# Altium PCB eDP_adapter_dvt1.PcbDoc (part 2 of 2)
Units mil, origin at the board's own origin, x right, y up, seen from the top; angles counter-clockwise.
Board outline 1964.57 x 1377.95 mil, 4 copper layers (Top Layer, Internal Plane 1, Internal Plane 2, Bottom Layer), stack 65.8 mil thick; 112 components, 78 nets, 1150 pads, 214 vias.
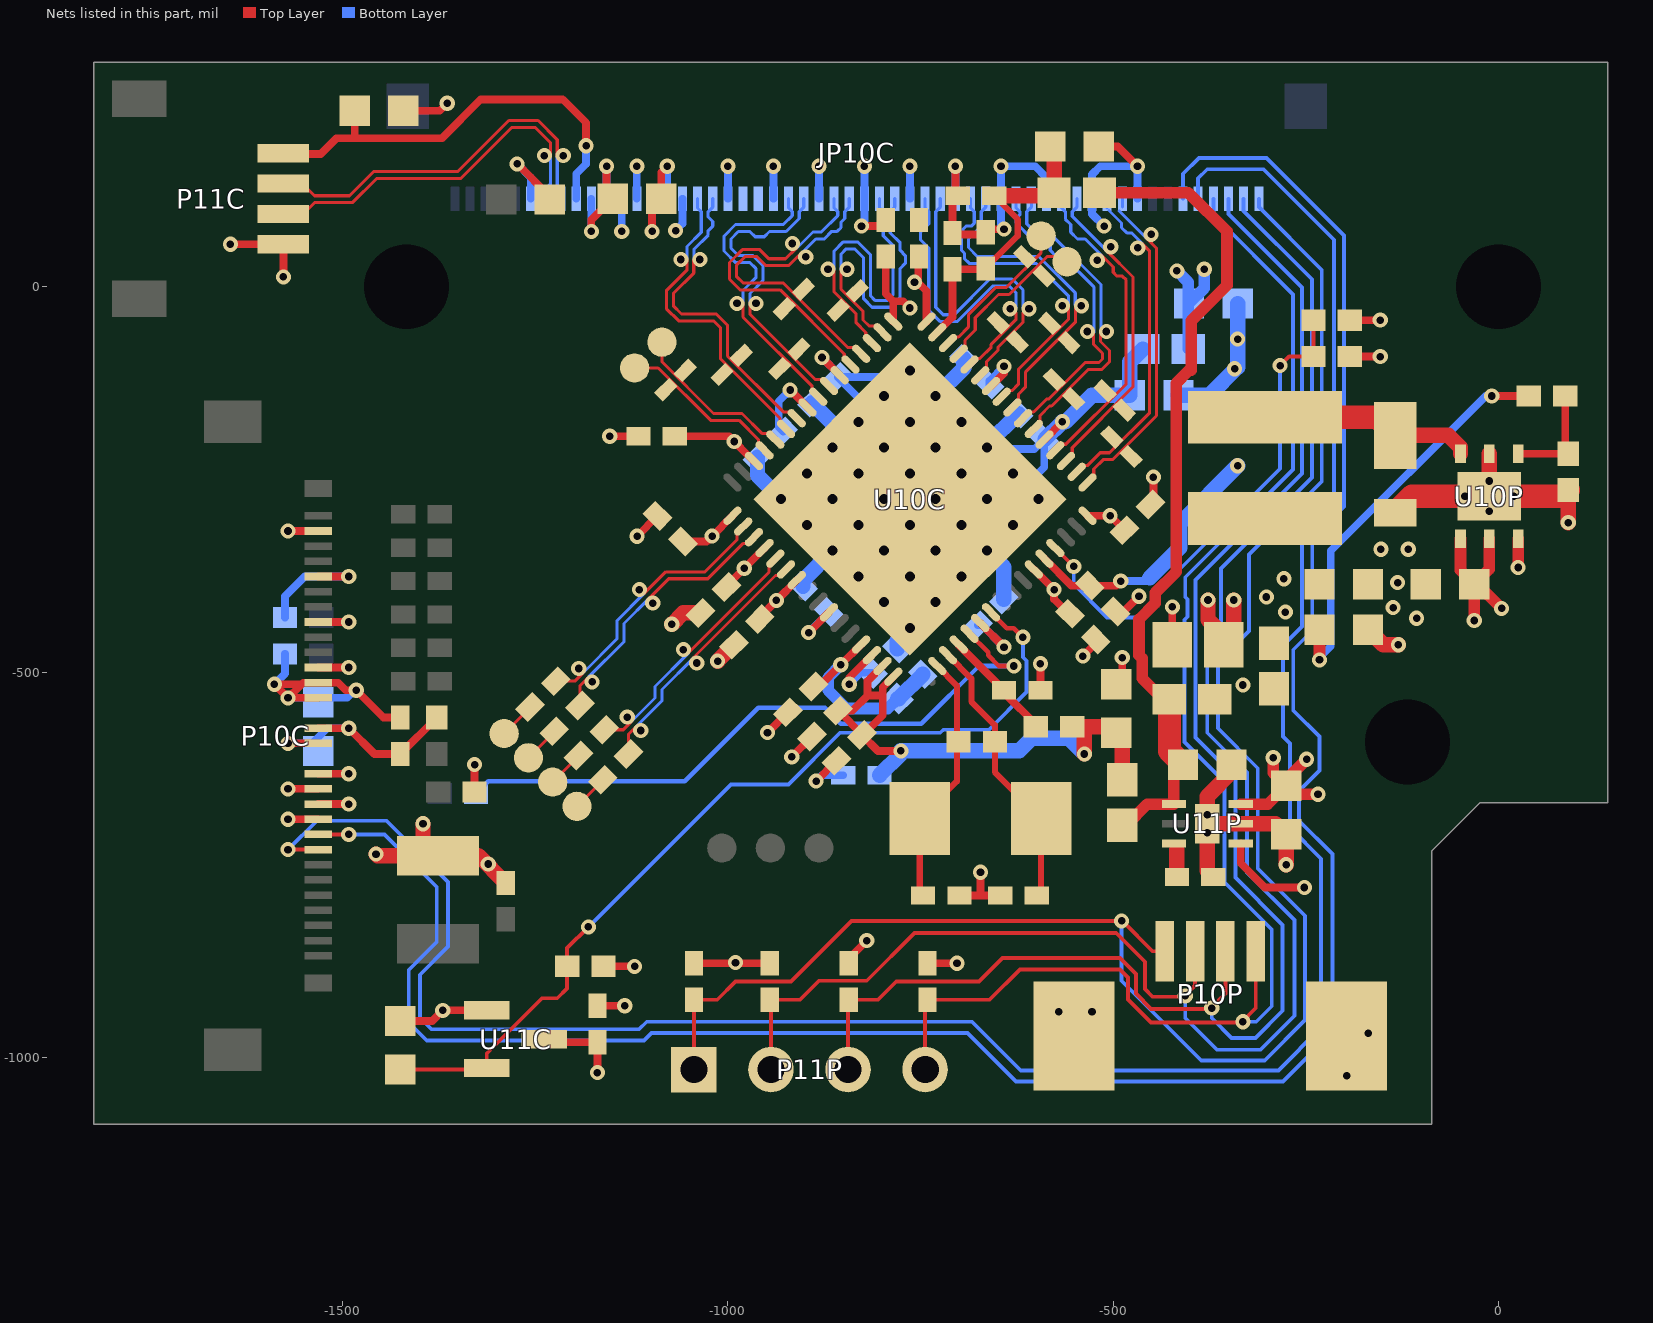
[diagram p4: the nets of this part, all layers, seen from the top]

## Via types
v1: diameter 19.68, hole 9.84, Top Layer to Bottom Layer, tented top, 176 vias
v2: diameter 25.98, hole 12.99, Top Layer to Bottom Layer, tented top, 36 vias
v3: diameter 20, hole 10, Top Layer to Bottom Layer, tented bottom, 2 vias

## Nets (pads, with @x,y where several pads share a name; then routed paths per layer and width w, separated by ;. In a path a pad name is that pad's centre, name@x,y a point inside that pad or via, vN(x,y) a via of type N, cw(c..) or ccw(c..) an arc to the next point about the centre after c; other vN are vias at no path point) (continued)
GND: C10P.1 C11P.1 C12P.2 C13P.2 C14P.1 C15P.1 C16C.2 C16P.1 C17C.1 C17P.1 C18C.1 C18P.1 C19C.1 C19P.1 C20P.1 C21P.1 C22P.1 C23C.2 C23P.1 C24P.1 C25C.2 C25P.1 C26C.2 C26P.1 C27C.2 C27P.1 C28C.2 C29C.2 C30C.2 C31C.2 C32C.2 C33C.2 C34C.2 C35C.2 C36C.2 C37C.2 C38C.2 C39C.2 C40C.2 C41C.2 C42C.2 C43C.2 C44C.2 C45C.2 C46C.2 C47C.2 C48C.2 C49C.1 C50C.1 C51C.2 D10P.1 JP10C.6 JP10C.10 JP10C.11 JP10C.16 JP10C.19 JP10C.22 JP10C.25 JP10C.28 JP10C.31 JP10C.34 JP10C.37 JP10C.40 JP10C.43 JP10C.46 P10C.2 P10C.5 P10C.8 P10C.11 P10C.15 P10C.16 P10C.18 P10C.19 P10C.20 P10C.21 P10P.MP1 P10P.MP2 P11C.1 R10P.2 R17C.2 R25C.2 R31C.2 U10C.65 U10P.2 U10P.7 U11C.1 U11P.2 U11P.PAD | length 4668.8
  Top Layer w10: v1(-1645.67,55.12) P11C.1@-1576.77,55.12 v1(-1576.77,12.8) ; v1(-1570.87,-690.94) P10C.21@-1531.5,-690.94 ; v1(-1570.87,-651.57) P10C.19@-1531.5,-651.57 ; v1(-1570.87,-592.52) P10C.16@-1531.5,-592.52 ; v1(-1570.87,-316.93) P10C.2@-1531.5,-316.93 ; P10C.20@-1531.5,-671.26 v1(-1492.13,-671.26) ; P10C.18@-1531.5,-631.89 v1(-1492.13,-631.89) ; P10C.15@-1531.5,-572.83 v1(-1492.13,-572.83) -1458.66,-606.3 C16C.2@-1425.2,-606.3 R25C.2@-1377.95,-559.06 ; P10C.11@-1531.5,-494.09 v1(-1492.13,-494.09) ; P10C.8@-1531.5,-435.04 v1(-1492.13,-435.04) ; P10C.5@-1531.5,-375.98 v1(-1492.13,-375.98) ; C51C.2@-1425.2,-952.76 -1383.86,-952.76 v1(-1370.08,-938.98) U11C.1@-1312.99,-938.98 ; C49C.1@-1421.26,228.35 -1374.02,228.35 v1(-1364.17,238.19) ; v1(-1273.62,159.45) -1231.3,117.13 C35C.2@-1231.3,113.19 ; v1(-1177.17,71.85) -1177.17,86.61 C50C.1@-1149.61,114.17 -1157.48,122.05 v1(-1157.48,156.5) ; C36C.2@-1169.29,-933.07 v1(-1133.86,-933.07) ; v1(-1153.45,-193.9) C29C.2@-1116.14,-193.9 ; v1(-1117.88,-323.65) C39C.2@-1091.51,-297.27 ; C24P.1@-1044.09,-877.95 C25P.1@-945.67,-877.95 ; v1(-948.59,-578.51) C40C.2@-922.22,-552.14 ; v1(-917.1,-610.01) C46C.2@-890.72,-583.63 ; v1(-885.6,-641.51) C45C.2@-859.22,-615.13 ; C26P.1@-843.31,-877.95 -843.31,-871.85 v1(-819.88,-848.43) ; v1(-826.67,78.74) C30C.2@-789.37,78.74 ; C27P.1@-740.94,-877.95 v1(-702.76,-877.95) ; C48C.2@-708.66,67.91 -666.34,67.91 -659.45,74.8 v1(-641.73,74.8) ; C48C.2@-708.66,69.88 -708.66,111.22 C18P.1@-701.77,118.11 -704.72,121.06 v1(-704.72,156.5) ; C18C.1@-699.52,-790.07 -672.24,-790.07 ; v1(-672.24,-759.84) -672.24,-790.07 ; C19C.1@-646.54,-790.07 -672.24,-790.07 ; C44C.2@-594.49,-523.62 v1(-594.49,-489.17) ; v1(-539.37,-479.33) -522.67,-462.63 C27C.2@-522.67,-457.65 ; C19P.1@-518.7,182.09 -494.09,182.09 v1(-468.5,156.5) ; C25C.2@-491.17,-426.15 v1(-466.59,-401.57) ; C15P.1@-488.19,-515.75 v1(-488.19,-481.3) ; C31C.2@-451.8,-282.51 -447.83,-278.54 v1(-447.83,-247.05) ; C12P.2@-423.23,-464.57 v1(-423.23,-415.35) ; R17C.2@-192.91,-43.31 v1(-153.54,-43.31)
  Top Layer w20: v1(-1456.69,-736.22) -1454.72,-738.19 C23C.2@-1375.98,-738.19 ; v1(-1395.67,-696.85) -1395.67,-718.5 C23C.2@-1375.98,-738.19 ; C34C.2@-1288.39,-773.62 -1323.82,-738.19 C23C.2@-1375.98,-738.19 ; v1(-1072.83,-437.99) -1058.04,-423.2 C41C.2@-1035.4,-423.2 ; v1(-1013.36,-485.8) C43C.2@-992.1,-464.54 ; C16P.1@-370.08,-765.75 -377.95,-757.87 v3(-377.95,-708.66) U11P.PAD@-377.95,-696.85 ; C17P.1@-346.46,-620.08 -346.46,-629.92 -377.95,-661.42 v3(-377.95,-685.04) U11P.PAD@-377.95,-696.85 ; v1(-275.59,-750) C20P.1@-275.59,-710.63 -289.37,-696.85 U11P.2@-334.65,-696.85 U11P.PAD@-377.95,-696.85 ; C11P.1@-169.29,-444.88 -149.61,-464.57 v1(-129.92,-464.57) ; U10P.7@-11.97,-271.78 v1(-11.97,-252.09) U10P.2@-11.97,-216.66 ; v1(90.55,-306.1) R10P.2@90.55,-263.78
  Top Layer w30: D10P.1@-133.86,-293.31 -112.33,-271.78 v1(-43.46,-271.78) U10P.7@-11.97,-271.78 v1(19.53,-271.78) 82.55,-271.78 R10P.2@90.55,-263.78
  Bottom Layer w10: R31C.2@-1574.8,-429.13 -1574.8,-401.57 -1549.21,-375.98 v1(-1492.13,-375.98) ; v1(-1570.87,-592.52) -1539.37,-592.52 -1519.69,-572.83 v1(-1492.13,-572.83) ; v1(-1273.62,159.45) -1255.91,141.73 JP10C.6@-1255.91,114.17 ; v1(-1177.17,71.85) JP10C.10@-1177.17,114.17 ; JP10C.11@-1157.48,114.17 v1(-1157.48,156.5) ; v1(-1067.91,72.83) -1059.06,81.69 JP10C.16@-1059.06,114.17 ; JP10C.19@-1000,114.17 v1(-1000,156.5) ; JP10C.22@-940.94,114.17 v1(-940.94,156.5) ; v1(-885.6,-641.51) -877.95,-633.86 C14P.1@-850.39,-633.86 ; JP10C.25@-881.89,114.17 v1(-881.89,156.5) ; v1(-826.67,78.74) -822.83,82.58 JP10C.28@-822.83,114.17 v1(-822.83,156.5) ; JP10C.31@-763.78,114.17 v1(-763.78,156.5) ; JP10C.34@-704.72,114.17 v1(-704.72,156.5) ; v1(-641.73,74.8) -645.67,78.74 JP10C.37@-645.67,114.17 v1(-645.67,156.5) -601.38,156.5 -586.61,141.73 JP10C.40@-586.61,114.17 ; v1(-511.81,78.74) -527.56,94.49 JP10C.43@-527.56,114.17 -527.56,145.67 -516.73,156.5 v1(-468.5,156.5) JP10C.46@-468.5,114.17
  Bottom Layer w20: C33C.2@-961.59,-221.43 -961.59,-244.82 v2(-930.81,-275.59) ; C42C.2@-902.53,-388.81 -902.53,-380.93 v2(-864,-342.4) ; C37C.2@-890.72,-150.56 -864,-177.28 v2(-864,-208.78) ; C22P.1@-780.48,-469.52 -780.48,-459.33 v2(-763.78,-442.62) ; v2(-730.37,-141.96) -693.87,-105.46 C32C.2@-693.87,-93.53 ; v2(-663.56,-342.4) -641.98,-363.98 C26C.2@-641.98,-405.74 ; v2(-663.56,-208.78) -663.56,-204.96 C38C.2@-623,-164.4 ; C23P.1@-415.35,-140.75 -375,-140.75 -338.58,-104.33 C21P.1@-338.58,-21.65
  other v1: -196.85,-1023.62 -169.29,-968.5 -570.87,-940.94 -527.56,-940.94 -990.16,-876.97 -1311.02,-749.02 -106.3,-430.12 -136.81,-416.34 -130.91,-383.86 -152.56,-340.55 -117.13,-340.55 -11.97,-291.46 -342.52,-106.3 -338.58,-67.91
  other v2: -797.19,-409.22 -730.37,-409.22 -830.59,-375.81 -763.78,-375.81 -696.97,-375.81 -797.19,-342.4 -730.37,-342.4 -897.41,-309 -830.59,-309 -763.78,-309 -696.97,-309 -630.15,-309 -864,-275.59 -797.19,-275.59 -730.37,-275.59 -663.56,-275.59 -596.75,-275.59 -897.41,-242.18 -830.59,-242.18 -763.78,-242.18 -696.97,-242.18 -630.15,-242.18 -797.19,-208.78 -730.37,-208.78 -830.59,-175.37 -763.78,-175.37 -696.97,-175.37 -797.19,-141.96 -763.78,-108.56
GPIO_PWM1: JP10C.50 P10C.23 | length 3031.4
  Top Layer w5: v1(-1570.87,-730.32) P10C.23@-1531.5,-730.32
  Bottom Layer w5: v1(-1570.87,-730.32) -1533.46,-692.91 -1442.91,-692.91 -1363.19,-772.64 -1363.19,-856.3 -1399.61,-892.72 -1399.61,-948.82 -1384.84,-963.58 -1115.16,-963.58 -1105.32,-953.74 -683.07,-953.74 -619.93,-1016.88 -285.58,-1016.88 -230.17,-961.47 -230.17,-742.27 -270.67,-701.77 -270.67,-592.52 -279.53,-583.66 -279.53,-465.55 -254.92,-440.94 -254.92,-320.87 -213.58,-279.53 -213.58,61.02 -305.12,152.56 -377.95,152.56 -389.76,140.75 JP10C.50@-389.76,114.17
I2C_ADR: R16C.2 R17C.1 U10C.13 | length 660.9
  Top Layer w5: U10C.13@-575.17,-338.92 v1(-551.18,-362.91) ; v1(-283.46,-102.36) -271.65,-90.55 R16C.2@-240.16,-90.55 R17C.1@-240.16,-43.31
  Bottom Layer w5: v1(-551.18,-362.91) -551.18,-385.83 -507.87,-429.13 -460.63,-429.13 -444.88,-413.39 -444.88,-397.64 -283.46,-236.22 v1(-283.46,-102.36)
LCD_BL_ON: JP10C.49 P10C.22 | length 3034.5
  Top Layer w5: P10C.22@-1531.5,-710.63 v1(-1492.13,-710.63)
  Bottom Layer w5: v1(-1492.13,-710.63) -1445.87,-710.63 -1377.8,-778.69 -1377.8,-850.25 -1414.22,-886.66 -1414.22,-954.87 -1390.9,-978.2 -1109.1,-978.2 -1099.26,-968.36 -689.12,-968.36 -625.98,-1031.5 -279.53,-1031.5 -215.55,-967.52 -215.55,-736.22 -258.86,-692.91 -258.86,-654.53 -232.28,-627.95 -232.28,-583.66 -266.3,-549.64 -266.3,-471.03 -241.7,-446.42 -241.7,-326.34 -200.36,-285 -200.36,66.5 -301.18,167.32 -388.78,167.32 -409.45,146.65 JP10C.49@-409.45,114.17
LCD_XM: C26P.2 JP10C.52 P10P.3 P11P.3 | length 2035.7
  Top Layer w5: P11P.3@-844.09,-1015.75 -844.09,-925.98 C26P.2@-843.31,-925.2 -805.12,-925.2 -781.5,-901.57 -674.21,-901.57 -643.7,-871.06 -491.14,-871.06 -470.47,-891.73 -470.47,-917.32 -450.79,-937.01 -374.02,-937.01 -354.33,-917.32 P10P.3@-354.33,-862.2
  Bottom Layer w5: v1(-372.05,-936.02) -372.05,-949.21 -346.46,-974.8 -315.35,-974.8 -280.12,-939.57 -280.12,-828.21 -341.54,-766.8 -341.54,-636.81 -393.31,-585.04 -393.31,-380.52 -254.92,-242.13 -254.92,-0.98 -350.39,94.49 JP10C.52@-350.39,114.17
LCD_XP: C24P.2 JP10C.54 P10P.1 P11P.1 | length 2343.1
  Top Layer w5: P11P.1@-1044.09,-1015.75 C24P.2@-1044.09,-925.2 -1013.78,-925.2 -990.16,-901.57 -918.31,-901.57 -839.57,-822.83 -488.19,-822.83 -448.82,-862.2 P10P.1@-433.07,-862.2
  Bottom Layer w5: v1(-489.17,-822.83) -489.17,-900.59 -385.83,-1003.94 -303.28,-1003.94 -250.98,-951.64 -250.98,-816.14 -312.4,-754.73 -312.4,-624.74 -364.17,-572.97 -364.17,-487.2 -323.82,-446.85 -323.82,-347.21 -229.33,-252.73 -229.33,21.65 -311.02,103.35 JP10C.54@-311.02,114.17
LCD_YM: C27P.2 JP10C.51 P10P.4 P11P.4 | length 1905
  Top Layer w5: P11P.4@-744.09,-1015.75 -744.09,-928.35 C27P.2@-740.94,-925.2 -660.43,-925.2 -621.06,-885.83 -491.14,-885.83 -480.81,-896.16 -480.81,-924.7 -450.79,-954.72 -333.66,-954.72 -314.96,-936.02 P10P.4@-314.96,-862.2
  Bottom Layer w5: JP10C.51@-370.08,114.17 -370.08,93.5 -266.73,-9.84 -266.73,-237.23 -406.5,-377 -406.5,-402.56 -403.54,-405.51 -403.54,-428.15 -407.48,-432.09 -407.48,-590.9 -355.7,-642.68 -355.7,-772.67 -294.29,-834.08 -294.29,-933.7 -314.33,-953.74 v1(-331.69,-953.74)
LCD_YP: C25P.2 JP10C.53 P10P.2 P11P.2 | length 2190.1
  Top Layer w5: P11P.2@-944.09,-1015.75 -944.09,-926.77 C25P.2@-945.67,-925.2 -906.5,-925.2 -881.89,-900.59 -819.88,-900.59 -757.87,-838.58 -496.06,-838.58 -458.66,-875.98 -458.66,-911.42 -448.82,-921.26 -408.46,-921.26 -393.7,-906.5 P10P.2@-393.7,-862.2
  Bottom Layer w5: v1(-406.5,-920.28) -406.5,-948.82 -365.16,-990.16 -308.99,-990.16 -264.76,-945.93 -264.76,-821.85 -326.18,-760.44 -326.18,-630.45 -377.95,-578.67 -377.95,-479.33 -360.24,-461.61 -360.24,-365.54 -242.13,-247.43 -242.13,9.84 -330.71,98.43 JP10C.53@-330.71,114.17
LVDS0_CLK_N: JP10C.36 R11C.2 U10C.24 | length 418.1
  Top Layer w4.02: U10C.24@-630.85,-156.58 -622.7,-148.43 -622.7,-139.11 -614.02,-130.42 -614.02,-111.02 -549.06,-46.06 v1@-549.06,-23.62
  Bottom Layer w4.02: JP10C.36@-665.35,114.17 -665.35,103.35 -671.26,97.44 -671.26,78.79 -687.83,62.21 -687.83,50.98 -676.23,39.37 -596.5,39.37 -549.21,-7.92 v1@-549.21,-23.62
  other v1: -541.34,-24.61
LVDS0_CLK_P: JP10C.35 R11C.1 U10C.25 | length 417.2
  Top Layer w4.02: U10C.25@-644.77,-142.66 -636.81,-134.7 -631.05,-134.7 -623.03,-126.69 -623.03,-107.28 -558.07,-42.32 v1@-558.07,-23.62
  Bottom Layer w4.02: JP10C.35@-685.04,114.17 -685.04,102.2 -680.28,97.44 -680.28,82.52 -684.06,78.74 -690.95,78.74 -694.88,74.8 -694.88,67.91 -696.85,65.94 -696.85,47.24 -692.91,43.31 -692.91,36.42 -686.85,30.35 -600.24,30.35 -558.23,-11.65 v1@-558.23,-23.62
  other v1: -565.94,-24.61
LVDS0_TX_0_N: JP10C.45 R14C.2 U10C.17 | length 426.9
  Top Layer w4.02: U10C.17@-533.41,-254.02 -525.27,-245.87 -525.27,-236.55 -513.13,-224.41 -500.98,-224.41 -474.41,-197.83 -443.74,-167.16 -443.74,49.99 v1@-455.24,61.49
  Bottom Layer w4.02: -492.13,98.43 v1@-455.71,62.01 ; JP10C.45@-488.19,103.35 JP10C.45@-488.19,114.17
  other v1: -450.79,67.91
LVDS0_TX_0_P: JP10C.44 R14C.1 U10C.18 | length 425.3
  Top Layer w4.02: U10C.18@-547.33,-240.1 -539.38,-232.14 -533.61,-232.14 -516.86,-215.39 -504.72,-215.39 -452.76,-163.43 -452.76,46.26 v1@-461.61,55.12
  Bottom Layer w4.02: JP10C.44@-507.87,102.2 JP10C.44@-507.87,114.17 ; JP10C.44@-505.39,98.94 -489.17,82.72 -489.17,76.77 -482.31,69.9 -476.36,69.9 v1@-462.08,55.63
  other v1: -468.19,50.51
LVDS0_TX_1_N: JP10C.42 R13C.2 U10C.19 | length 410.1
  Top Layer w4.02: U10C.19@-561.25,-226.18 -553.1,-218.03 -553.1,-208.71 -474.25,-129.85 -474.25,12.64 v1@-507.87,46.26
  Bottom Layer w4.02: JP10C.42@-547.24,114.17 -547.24,103.35 -553.15,97.44 -553.15,91.54 v1@-508.86,47.24
  other v1: -503.27,51.85
LVDS0_TX_1_P: JP10C.41 R13C.1 U10C.20 | length 411
  Top Layer w4.02: U10C.20@-575.17,-212.26 -567.21,-204.3 -561.45,-204.3 -483.27,-126.12 -483.27,8.9 -488.19,13.82 -495.12,13.82 -499.98,18.68 -499.98,25.61 v1@-514.25,39.88
  Bottom Layer w4.02: JP10C.41@-566.93,114.17 -566.93,102.2 -562.17,97.44 -562.17,87.8 -555.12,80.75 -555.12,70.87 -546.26,62.01 -536.37,62.01 v1@-515.23,40.87
  other v1: -520.67,34.45
LVDS0_TX_2_N: JP10C.39 R12C.2 U10C.22 | length 410.8
  Top Layer w4.02: U10C.22@-603.01,-184.42 -594.86,-176.27 -594.86,-166.95 -582.6,-154.69 -579.93,-154.69 -540.94,-115.7 -532.53,-107.28 -514.76,-107.28 -504.92,-97.44 -504.92,-82.68 -516.57,-71.02 v1@-516.57,-57.09
  Bottom Layer w4.02: JP10C.39@-606.3,114.17 -606.3,103.35 -612.2,97.44 -612.2,81.65 -603.39,72.83 -585.67,72.83 -515.75,2.91 v1@-515.75,-59.06
  other v1: -508.86,-58.07
LVDS0_TX_2_P: JP10C.38 R12C.1 U10C.23 | length 410.9
  Top Layer w4.02: U10C.23@-616.93,-170.5 -608.97,-162.54 -603.21,-162.54 -586.33,-145.67 -583.66,-145.67 -547.31,-109.32 -536.26,-98.27 -518.5,-98.27 -513.94,-93.71 -513.94,-86.41 -525.59,-74.76 v1@-525.59,-57.09
  Bottom Layer w4.02: JP10C.38@-625.98,114.17 -625.98,102.2 -621.22,97.44 -621.22,93.35 -625.98,88.58 -625.98,82.68 -607.13,63.82 -589.41,63.82 -581.69,56.1 -581.69,47.24 -574.8,40.35 -565.94,40.35 -524.76,-0.83 v1@-524.76,-59.06
  other v1: -533.46,-58.07
LVDS0_TX_3_N: JP10C.33 R10C.2 U10C.27 | length 413.3
  Top Layer w4.02: U10C.27@-672.61,-114.82 -664.46,-106.67 -664.46,-97.35 -649.45,-82.34 -649.45,-78.54 -616.97,-46.06 v1@-616.97,-33.46
  Bottom Layer w4.02: JP10C.33@-724.41,114.17 -724.41,103.35 -730.31,97.44 -730.31,32.68 -730.31,-26.57 -720.63,-36.26 -706.49,-36.26 -660.23,10 -631.11,10 -617.13,-3.98 v1@-617.13,-27.56
  other v1: -609.25,-28.54
LVDS0_TX_3_P: JP10C.32 R10C.1 U10C.28 | length 413.2
  Top Layer w4.02: U10C.28@-686.53,-100.9 -678.57,-92.94 -672.8,-92.94 -658.46,-78.61 -658.46,-74.8 -625.98,-42.32 v1@-625.98,-33.46
  Bottom Layer w4.02: JP10C.32@-744.09,114.17 -744.09,102.2 -739.33,97.44 -739.33,81.54 -750,70.87 -750,60.87 -739.33,50.2 -739.33,-30.31 -724.36,-45.28 -702.76,-45.28 -656.5,0.98 -634.84,0.98 -626.14,-7.72 v1@-626.14,-27.56
  other v1: -633.86,-28.54
LVDS1_CLK_N: JP10C.21
LVDS1_CLK_P: JP10C.20
LVDS1_TX0_N: JP10C.30 R18C.1 U10C.34 | length 416.2
  Top Layer w4.02: v1@-853.19,20.67 -853.19,-3.16 -824.65,-31.7 -824.65,-43.1 -816.74,-51 -807.42,-51 U10C.34@-799.27,-59.14
  Bottom Layer w4.02: v1@-853.35,22.64 -853.35,42.32 -846.46,49.21 -835.63,49.21 -823.82,37.4 -823.82,-15.75 -812.99,-26.57 -789.37,-26.57 -776.57,-13.78 -776.57,23.62 -769.69,30.51 -769.69,40.35 -776.57,47.24 -776.57,57.09 -789.37,69.88 -789.37,97.44 -783.46,103.35 JP10C.30@-783.46,114.17
  other v1: -845.47,22.64
LVDS1_TX0_P: JP10C.29 R18C.2 U10C.35 | length 416.4
  Top Layer w4.02: v1@-862.2,20.67 -862.2,-6.89 -833.66,-35.43 -833.66,-46.83 -821.15,-59.34 -821.15,-65.11 U10C.35@-813.19,-73.06
  Bottom Layer w4.02: v1@-862.36,22.64 -862.36,46.06 -850.19,58.23 -831.9,58.23 -814.8,41.14 -814.8,12.8 -814.8,-12.01 -809.26,-17.56 -793.1,-17.56 -785.59,-10.05 -785.59,53.35 -798.39,66.15 -798.39,97.44 -803.15,102.2 JP10C.29@-803.15,114.17
  other v1: -870.08,22.64
LVDS1_TX1_N: JP10C.27 R19C.1 U10C.36 | length 425.1
  Top Layer w4.02: v1@-905.04,43.82 -921.46,27.4 -950.63,27.4 -962.44,39.21 -977.56,39.21 -989.02,27.76 -989.02,13.58 -980.52,5.08 -928.5,5.08 -844.58,-78.84 -835.26,-78.84 U10C.36@-827.11,-86.98
  Bottom Layer w4.02: v1@-904.55,43.33 -885.87,62.01 -875.05,62.01 -865.2,71.85 -858.27,71.85 -853.35,76.77 -853.35,83.71 -848.43,88.63 -848.43,97.44 -842.52,103.35 JP10C.27@-842.52,114.17
  other v1: -898.94,38.7
LVDS1_TX1_P: JP10C.26 R19C.2 U10C.37 | length 427
  Top Layer w4.02: v1@-911.42,50.2 -925.2,36.42 -946.9,36.42 -958.71,48.23 -981.3,48.23 -998.03,31.5 -998.03,9.84 -984.25,-3.94 -932.23,-3.94 -848.99,-87.18 -848.99,-92.94 U10C.37@-841.03,-100.9
  Bottom Layer w4.02: v1@-910.93,49.7 -889.61,71.02 -878.78,71.02 -857.44,92.36 -857.44,97.44 -862.2,102.2 JP10C.26@-862.2,114.17
  other v1: -916.34,56.1
LVDS1_TX2_N: JP10C.24 R20C.1 U10C.39 | length 408.7
  Top Layer w4.02: v1@-971.3,-20.67 -971.3,-35.64 -886.34,-120.59 -877.02,-120.59 U10C.39@-868.87,-128.74
  Bottom Layer w4.02: v1@-971.3,-22.64 -971.3,-8.66 -954.72,7.92 -954.72,27.56 -967.52,40.35 -986.22,40.35 -996.06,50.2 -996.06,62.01 -986.38,71.69 -971.46,71.69 -964.72,64.96 -952.76,64.96 -946.02,71.69 -924.42,71.69 -907.48,88.63 -907.48,97.44 -901.57,103.35 JP10C.24@-901.57,114.17
  other v1: -963.58,-21.65
LVDS1_TX2_P: JP10C.23 R20C.2 U10C.40 | length 409.1
  Top Layer w4.02: v1@-980.32,-20.67 -980.32,-39.37 -890.75,-128.94 -890.75,-134.7 U10C.40@-882.79,-142.66
  Bottom Layer w4.02: v1@-980.32,-22.64 -980.32,-4.92 -963.74,11.65 -963.74,23.82 -971.25,31.34 -989.95,31.34 -1005.08,46.46 -1005.08,65.74 -990.11,80.71 -928.15,80.71 -916.5,92.36 -916.5,97.44 -921.26,102.2 JP10C.23@-921.26,114.17
  other v1: -988.19,-21.65
LVDS1_TX_3_N: JP10C.18 R21C.1 U10C.42 | length 407.1
  Top Layer w4.02: v1@-1044.29,34.45 -1044.29,17.76 -1070.87,-8.81 -1070.87,-24.65 -1060.24,-35.28 -1014.97,-35.28 -1000.44,-49.8 -1000.44,-90.01 -928.1,-162.35 -918.78,-162.35 U10C.42@-910.63,-170.5
  Bottom Layer w4.02: v1@-1044.13,36.42 -1044.13,48.43 -1025.59,66.97 -1025.59,72.83 -1019.69,78.74 -1019.69,84.65 -1025.59,90.55 -1025.59,97.44 -1019.69,103.35 JP10C.18@-1019.69,114.17
  other v1: -1036.42,35.43
LVDS1_TX_3_P: JP10C.17 R21C.2 U10C.43 | length 408.1
  Top Layer w4.02: v1@-1053.31,34.45 -1053.31,21.5 -1079.88,-5.08 -1079.88,-28.39 -1063.98,-44.29 -1018.7,-44.29 -1009.46,-53.53 -1009.46,-93.74 -1006.82,-96.38 -932.51,-170.7 -932.51,-176.46 U10C.43@-924.55,-184.42
  Bottom Layer w4.02: v1@-1053.15,36.42 -1053.15,52.17 -1034.61,70.71 -1034.61,97.44 -1039.37,102.2 JP10C.17@-1039.37,114.17
  other v1: -1061.02,35.43
NetC16P_2: C16P.2 U11P.6 | length 35.4
  Top Layer w20: C16P.2@-417.32,-765.75 -417.32,-730.32
NetC18C_2: C18C.2 R28C.2 U10C.2 Y10C.1 | length 330.3
  Top Layer w8: C18C.2@-746.76,-790.07 -750.98,-785.85 Y10C.1@-750.98,-689.85 -702.76,-641.63 -702.76,-517.57 U10C.2@-728.28,-492.04
NetC19C_2: C19C.2 R28C.1 U10C.3 Y10C.2 | length 364.4
  Top Layer w8: U10C.3@-714.37,-478.12 -684.06,-508.43 -684.06,-538.39 -653.54,-568.9 R28C.1@-653.54,-590.55 -653.54,-629.81 Y10C.2@-593.5,-689.85 -593.5,-784.27 C19C.2@-599.3,-790.07
NetC20C_2: C20C.2 J17C.1 | length 48.4
  Top Layer w4.02: J17C.1@-1290.35,-579.72 -1256.86,-546.23 C20C.2@-1256.86,-545.25
NetC21C_2: C21C.2 J18C.1 | length 48.4
  Top Layer w4.02: J18C.1@-1258.86,-611.22 -1225.36,-577.73 C21C.2@-1225.36,-576.74
NetC22C_1: C22C.1 J19C.1 | length 48.4
  Top Layer w4.02: J19C.1@-1195.87,-674.21 -1162.37,-640.72 C22C.1@-1162.37,-639.73
NetC24C_1: C24C.1 J20C.1 | length 48.4
  Top Layer w4.02: J20C.1@-1227.36,-642.72 -1193.87,-609.22 C24C.1@-1193.87,-608.24
NetC44C_1: C44C.1 R27C.2 U10C.4 | length 156.2
  Top Layer w10: U10C.4@-700.45,-464.2 -700.45,-464.91 C44C.1@-641.73,-523.62 -641.73,-526.57 -597.44,-570.87 R27C.2@-590.55,-570.87
NetD10P_2: D10P.2 L11P.1 U10P.3 | length 278.2
  Top Layer w20: D10P.2@-133.86,-192.91 -64.96,-192.91 -49.37,-208.5 U10P.3@-49.37,-216.66
  Top Layer w30: L11P.1@-303.15,-169.29 -157.48,-169.29 D10P.2@-133.86,-192.91
NetJ10C_1: J10C.1 R15C.2 U10C.29 | length 210.5
  Top Layer w4.02: U10C.29@-700.45,-86.98 -692.3,-78.84 -692.3,-69.51 -678.98,-56.19 -678.98,-40.15 -648.82,-10 -635,-10 -585.63,39.37 -566.93,39.37 J10C.1@-560.04,32.48
NetJ11C_1: J11C.1 R15C.1 U10C.30 | length 200.5
  Top Layer w4.02: U10C.30@-714.37,-73.06 -706.41,-65.11 -700.64,-65.11 -687.99,-52.46 -687.99,-36.42 -652.56,-0.98 -638.73,-0.98 -593.5,44.25 J11C.1@-593.5,65.94
NetJ14C_1: J14C.1 R22C.2 U10C.44 | length 214.5
  Top Layer w4.02: J14C.1@-1085.63,-71.85 -1085.63,-97.44 -1018.7,-164.37 -981.76,-164.37 -955.94,-190.19 -946.62,-190.19 U10C.44@-938.47,-198.34
NetJ16C_1: J16C.1 R22C.1 U10C.45 | length 216.3
  Top Layer w4.02: J16C.1@-1121.06,-105.32 -1090.51,-105.32 -1022.44,-173.39 -985.49,-173.39 -960.35,-198.53 -960.35,-204.3 U10C.45@-952.39,-212.26
NetR10P_1: R10P.1 R11P.2 U10P.1 | length 141.5
  Top Layer w10: U10P.1@25.43,-216.66 90.43,-216.66 86.61,-212.85 R11P.2@86.61,-141.73
NetR23C_1: R23C.1 U10C.62 | length 85.4
  Top Layer w10: v1(-842.52,-515.75) -842.52,-507.44 U10C.62@-813.19,-478.12
  Bottom Layer w10: v1(-842.52,-515.75) -827.78,-501.01 R23C.1@-812.96,-501.01
NetR29C_1: R29C.1 U10C.5 | length 860.7
  Top Layer w6: U10C.5@-686.53,-450.28 -662.4,-474.4 -662.4,-478.35 -648.62,-492.13 v1(-628.94,-492.13)
  Bottom Layer w6: R29C.1@-1326.77,-657.48 -1311.02,-641.73 -1056.1,-641.73 -960.63,-546.26 -874.02,-546.26 -853.35,-566.93 -749.02,-566.93 -674.21,-492.13 v1(-628.94,-492.13)
P1.8VA: C12P.1 C22P.2 C30C.1 C31C.1 C32C.1 C33C.1 C39C.1 C40C.1 C41C.1 C42C.1 C43C.1 L10P.1 L12P.2 R23C.2 U10C.16 U10C.26 U10C.33 U10C.41 U10C.49 U10C.52 U10C.55 U10C.58 U10C.61 | length 1028.1
  Top Layer w10: C39C.1@-1058.1,-330.68 -1027.66,-330.68 v1(-1020.52,-323.54) U10C.49@-994.15,-297.17 ; C41C.1@-1002,-389.79 -1002,-388.53 v1(-978.77,-365.3) U10C.52@-952.39,-338.92 ; C43C.1@-958.69,-431.13 -958.69,-428.74 v1(-937.01,-407.06) U10C.55@-910.63,-380.68 ; v1(-919.29,-134) U10C.41@-896.71,-156.58 ; v1(-895.25,-448.82) U10C.58@-868.87,-422.44 ; C40C.1@-888.81,-518.73 -881.64,-518.73 v1(-853.49,-490.58) U10C.61@-827.11,-464.2 ; C30C.1@-795.28,39.37 -795.28,-8.86 -785.35,-18.78 ; U10C.33@-785.35,-45.22 -785.35,-18.78 ; v1(-763.78,-27.56) -772.56,-18.78 -785.35,-18.78 ; U10C.26@-658.69,-128.74 -658.27,-128.74 -641.73,-112.2 v1(-641.73,-103.35) ; U10C.16@-533.41,-297.17 v1(-503.96,-297.17) C31C.1@-485.21,-315.92
  Top Layer w20: v1(-376.97,-406.5) -376.97,-432.09 -356.3,-452.76 C12P.1@-356.3,-464.57 -343.5,-451.77 v1(-343.5,-406.5)
  Bottom Layer w10: C33C.1@-928.18,-188.02 -934.06,-182.14 -934.06,-148.76 v1(-919.29,-134) ; v1(-895.25,-448.82) -895.25,-448.34 C42C.1@-869.12,-422.22 ; C32C.1@-660.46,-126.94 -660.46,-122.08 v1(-641.73,-103.35)
  Bottom Layer w15: v1(-853.49,-490.58) -870.08,-507.16 -870.08,-523.62 -846.46,-547.24 -792.38,-547.24 R23C.2@-779.56,-534.42
  Bottom Layer w20: R23C.2@-779.56,-534.42 -778.57,-534.42 C22P.2@-747.08,-502.92
  other v1: -331.69,-516.73
P1.8VA_DP_PLL: C14P.2 C15P.2 C45C.1 C46C.1 L13P.2 R27C.1 U10C.63 U10C.64 | length 764
  Top Layer w10: C46C.1@-857.31,-550.23 C46C.1@-856.33,-550.23 ; U10C.63@-799.27,-492.04 -818.9,-511.66 -818.9,-530.51 ; U10C.64@-785.35,-505.96 -799.21,-519.82 -799.21,-532.48 ; v1(-775.59,-602.36) -805.18,-602.36 C45C.1@-825.82,-581.72 C45C.1@-824.83,-581.72 ; C15P.2@-496.06,-570.87 C15P.2@-488.19,-578.74 ; C46C.1@-856.33,-550.23 -838.61,-550.23 -818.9,-530.51 ; C46C.1@-856.33,-550.23 C45C.1@-824.83,-581.72 ; C45C.1@-824.83,-581.72 -799.21,-556.1 -799.21,-532.48 ; -818.9,-530.51 -801.18,-530.51 -799.21,-532.48
  Top Layer w20: v1(-537.4,-606.3) -537.4,-576.77 -543.31,-570.87 C15P.2@-496.06,-570.87 ; L13P.2@-488.19,-639.76 C15P.2@-488.19,-578.74
  Bottom Layer w20: C14P.2@-803.15,-633.86 -775.59,-606.3 v1(-775.59,-602.36) -622.05,-602.36 -605.32,-585.63 -558.07,-585.63 v1(-537.4,-606.3)
P1.8VA_LVDS_PLL: C18P.2 C19P.2 C47C.1 C48C.1 L14P.2 U10C.31 | length 399.4
  Top Layer w8: C47C.1@-665.35,23.62 -665.35,24.61 -623.89,66.07 -623.89,87.47 C18P.2@-654.53,118.11
  Top Layer w10: U10C.31@-728.28,-59.14 -708.66,-39.52 C48C.1@-708.66,22.64 -666.34,22.64 C47C.1@-665.35,23.62
  Top Layer w20: C18P.2@-654.53,118.11 -580.71,118.11 L14P.2@-576.77,122.05 -576.77,177.17 C19P.2@-581.69,182.09
P1.8VA_REG: C17P.2 L10P.2 L13P.1 L14P.1 U11P.4 | length 1089.8
  Top Layer w15: L14P.1@-517.72,122.05 -402.56,122.05 -352.36,71.85 -352.36,1.97 -398.62,-44.29 -398.62,-108.27 -401.57,-108.27 -418.31,-125 -418.31,-370.08 -445.25,-397.02 -445.25,-410.42 -466.54,-431.7 -466.54,-478.35 -462.6,-482.28 -462.6,-507.87 -435.04,-535.43 L10P.2@-427.17,-535.43 ; L13P.1@-488.19,-698.82 -483.27,-698.82 -455.71,-671.26 U11P.4@-421.26,-671.26 -421.26,-631.89 C17P.2@-409.45,-620.08
  Top Layer w30: L10P.2@-427.17,-535.43 -427.17,-602.36 C17P.2@-409.45,-620.08
P1.8VD: C10P.2 C11P.2 C26C.1 C27C.1 C28C.1 C29C.1 L11P.2 L12P.1 R11P.1 U10C.6 U10C.11 U10C.32 U10C.46 | length 901.3
  Top Layer w10: C29C.1@-1068.9,-193.9 -998.59,-193.9 U10C.46@-966.31,-226.18 ; C28C.1@-751.97,39.37 -752.95,38.39 -752.95,4.92 -742.2,-5.83 U10C.32@-742.2,-45.22 ; U10C.6@-672.61,-436.36 -672.61,-436.64 v1(-641.73,-467.52) ; U10C.11@-603.01,-366.76 v1(-576.77,-393) -576.77,-405.51 -558.04,-424.24 C27C.1@-556.07,-424.24 ; v1(-8.86,-141.73) R11P.1@39.37,-141.73
  Top Layer w15: v1(-232.28,-484.25) C11P.2@-232.28,-444.88
  Bottom Layer w10: C26C.1@-675.39,-439.14 -670.11,-439.14 v1(-641.73,-467.52) ; v1@-235.24,-484.25 -217.52,-466.54 -217.52,-342.52 -16.73,-141.73 v1(-8.86,-141.73)
  other v1: -276.57,-422.24 -301.18,-402.56 -278.54,-378.94 -991.7,-200.79 -757.87,5.91
P3.3V: C13P.1 C16C.1 C17C.2 C20P.2 C21P.2 C25C.1 C36C.1 C50C.2 JP10C.12 JP10C.13 JP10C.14 JP10C.15 L15P.1 P10C.12 P10C.13 R16C.1 R24C.1 R26C.1 R30C.2 U10C.12 U10P.4 U10P.5 U10P.6 U11C.3 U11P.1 U11P.3 | length 1995.2
  Top Layer w10: P10C.13@-1531.5,-533.46 v1(-1570.87,-533.46) ; C16C.1@-1425.2,-559.06 -1446.85,-559.06 v1(-1482.28,-523.62) -1496.06,-523.62 -1505.91,-513.78 P10C.12@-1531.5,-513.78 -1551.18,-513.78 -1555.12,-517.72 ; R24C.1@-1328.74,-655.51 v1(-1328.74,-620.08) ; U11C.3@-1238.19,-976.38 -1234.25,-980.31 C36C.1@-1169.29,-980.31 v1(-1169.29,-1019.68) ; R26C.1@-1161.42,-881.89 v1(-1121.06,-881.89) ; v1(-1098.43,71.85) -1098.43,102.36 C50C.2@-1086.61,114.17 -1086.61,148.62 v1(-1078.74,156.5) ; U10C.12@-589.09,-352.84 -554.14,-387.8 -496.06,-387.8 v1(-490.16,-381.89) ; U11P.1@-334.65,-722.44 -334.65,-748.03 -303.15,-779.53 v1(-251.97,-779.53) ; R16C.1@-192.91,-90.55 v1(-153.54,-90.55) ; v1(-1570.87,-533.46) v1(-1588.58,-515.75) -1557.09,-515.75 -1555.12,-517.72 ; v1(-1570.87,-533.46) -1555.12,-517.72
  Top Layer w15: U11P.3@-334.65,-671.26 -299.21,-671.26 C20P.2@-275.59,-647.64 ; v1(-292.32,-611.22) -292.32,-630.91 C20P.2@-275.59,-647.64 ; v1(-249.02,-613.19) -275.59,-639.76 C20P.2@-275.59,-647.64 ; v1(-234.25,-658.46) -264.76,-658.46 C20P.2@-275.59,-647.64 ; U10P.4@-49.37,-326.9 -49.37,-367.95 C13P.1@-31.5,-385.83 ; v1(-31.5,-433.07) C13P.1@-31.5,-385.83 ; U10P.5@-11.97,-326.9 -11.97,-366.3 C13P.1@-31.5,-385.83 ; v1(3.94,-417.32) -27.56,-385.83 C13P.1@-31.5,-385.83 ; v1(25.43,-364.33) U10P.6@25.43,-326.9
  Bottom Layer w10: v1(-1588.58,-515.75) -1574.8,-501.97 R30C.2@-1574.8,-476.38 ; v1(-1570.87,-533.46) -1494.09,-533.46 -1484.25,-523.62 v1(-1482.28,-523.62) ; v1(-1137.8,71.85) JP10C.12@-1137.8,114.17 ; JP10C.13@-1118.11,114.17 v1(-1118.11,156.5) ; v1(-1098.43,71.85) JP10C.14@-1098.43,114.17 ; JP10C.15@-1078.74,114.17 v1(-1078.74,156.5) ; v1(-490.16,-381.89) -456.69,-381.89 -452.76,-377.95
  Bottom Layer w15: v1(-417.32,20.67) -402.56,5.91 L15P.1@-402.56,-80.71 ; C21P.2@-401.57,-21.65 -381.89,-1.97 v1(-381.89,22.64)
  Bottom Layer w20: -452.76,-377.95 -413.39,-338.58 -413.39,-307.09 v1(-338.58,-232.28)
P3.3VA: C23P.2 C37C.1 C38C.1 L15P.2 U10C.21 U10C.38 | length 1275.5
  Top Layer w10: v1(-877.95,-91.82) U10C.38@-854.95,-114.82 ; U10C.21@-589.09,-198.34 v1(-565.95,-175.19)
  Bottom Layer w10: v1(-877.95,-91.82) -857.31,-112.46 C37C.1@-857.31,-117.15 ; C38C.1@-588.56,-197.81 C38C.1@-589.6,-197.81 ; v1(-565.95,-175.19) v1@-562.06,-175.19 ; C37C.1@-857.31,-117.15 -796.32,-178.15 ; C37C.1@-857.31,-117.15 -789.34,-117.15 -772.89,-133.61 -772.89,-153.38 ; -796.32,-178.15 -796.32,-176.81 -772.89,-153.38 ; -796.32,-178.15 -775.19,-199.27 -754.39,-199.27 ; -772.89,-153.38 -752.13,-153.38 -730.32,-175.2 ; -754.39,-199.27 -730.32,-175.2 ; -754.39,-199.27 -754.39,-218.05 -729.33,-243.11 ; -730.32,-175.2 -694.39,-211.12 ; -729.33,-243.11 -697.34,-211.12 -694.39,-211.12 ; -729.33,-243.11 -708.26,-264.18 -685.44,-264.18 ; -694.39,-211.12 -663.39,-242.13 ; -685.44,-264.18 -663.39,-242.13 ; -685.44,-264.18 -685.55,-264.29 -685.55,-278.54 -685.55,-287.87 -675.84,-297.58 -654.45,-297.58 -631.89,-275.02 -631.89,-264.18 ; -663.39,-242.13 -631.89,-210.63 -602.42,-210.63 C38C.1@-589.6,-197.81 ; -663.39,-242.13 -641.34,-264.18 -631.89,-264.18 ; -631.89,-264.18 -619.49,-264.18 -589.6,-234.28 C38C.1@-589.6,-197.81
  Bottom Layer w20: C38C.1@-588.56,-197.81 v1(-565.95,-175.19) ; v1@-562.06,-175.19 -527.62,-140.75 C23P.2@-478.35,-140.75 -478.35,-97.44 L15P.2@-461.61,-80.71
RESET_N: C51C.1 R26C.2 U10C.7 U11C.2 | length 1185.1
  Top Layer w5: C51C.1@-1425.2,-1015.75 -1314.96,-1015.75 U11C.2@-1312.99,-1013.78 -1312.99,-995.08 -1241.14,-923.23 -1221.46,-923.23 -1208.66,-910.43 R26C.2@-1208.66,-881.89 -1208.66,-858.27 v1(-1181.1,-830.71)
  Top Layer w6: U10C.7@-658.69,-422.44 -638.22,-442.91 -628.94,-442.91 v1(-617.13,-454.72)
  Bottom Layer w5: v1(-1181.1,-830.71) -996.06,-645.67 -921.26,-645.67 -854.33,-578.74 -724.41,-578.74 -720.47,-574.8 -661.42,-574.8 -612.59,-525.98 -612.59,-485.36 -617.13,-480.83 v1(-617.13,-454.72)
TX2_N: C24C.2 U10C.53 | length 325.7
  Top Layer w4.02: C24C.2@-1160.46,-574.83 -1135.81,-574.83 v1@-1125.47,-564.49 ; v1@-1050.95,-474.64 -946.62,-370.31 -946.62,-360.99 U10C.53@-938.47,-352.84
  Bottom Layer w4.02: v1@-1124.49,-563.51 -1094.65,-533.67 -1094.65,-518.82 v1@-1051.49,-475.66
  other v1: -1130.59,-558.39 -1057.75,-470.79
TX2_P: C22C.2 U10C.54 | length 325
  Top Layer w4.02: C22C.2@-1128.97,-606.33 -1128.97,-580.74 v1@-1119.09,-570.87 ; v1@-1044.57,-481.02 -938.27,-374.72 -932.51,-374.72 U10C.54@-924.55,-366.76
  Bottom Layer w4.02: v1@-1118.11,-569.88 -1085.63,-537.4 -1085.63,-522.55 v1@-1045.11,-482.04
  other v1: -1113.19,-575.79 -1040.35,-488.19
TX3_N: C20C.1 U10C.50 | length 342.5
  Top Layer w4.02: C20C.1@-1223.45,-511.84 -1198.8,-511.84 v1@-1188.95,-501.99 ; v1@-1107.75,-397.17 -1080.51,-369.92 -1029.74,-369.92 -988.37,-328.56 -988.37,-319.23 U10C.50@-980.23,-311.09
  Bottom Layer w4.02: v1@-1187.48,-500.51 -1143.86,-456.9 -1143.86,-433.19 v1@-1108.58,-397.91
  other v1: -1193.58,-495.4 -1114.84,-393.03
TX3_P: C21C.1 U10C.51 | length 341.7
  Top Layer w4.02: C21C.1@-1191.96,-543.34 -1191.96,-517.75 v1@-1182.58,-508.37 ; v1@-1101.38,-403.54 -1076.77,-378.94 -1026,-378.94 -980.03,-332.96 -974.26,-332.96 U10C.51@-966.31,-325
  Bottom Layer w4.02: v1@-1181.1,-506.89 -1134.84,-460.63 -1134.84,-436.92 v1@-1102.2,-404.28
  other v1: -1176.18,-512.8 -1097.44,-410.43
USB_VID_N: JP10C.8 P11C.3 | length 491.3
  Top Layer w4.02: P11C.3@-1576.77,133.86 -1552.17,133.86 -1536.42,118.11 -1491.14,118.11 -1459.65,149.61 -1350.39,149.61 -1284.29,215.71 -1246.22,215.71 -1221.46,190.94 v1@-1221.46,169.29
  Bottom Layer w4.02: v1@-1221.46,169.29 -1221.46,131.89 -1216.54,126.97 JP10C.8@-1216.54,114.17
  other v1: -1213.58,170.28
USB_VID_P: JP10C.7 P11C.2 | length 476.3
  Top Layer w4.02: P11C.2@-1576.77,94.49 -1551.02,94.49 -1536.42,109.09 -1487.41,109.09 -1455.91,140.59 -1346.66,140.59 -1280.56,206.69 -1249.95,206.69 -1230.47,187.21 v1@-1230.47,169.29
  Bottom Layer w4.02: JP10C.7@-1236.22,114.17 -1236.22,127.13 -1230.47,132.87 v1@-1230.47,169.29
  other v1: -1238.19,170.28
USB_VID_P5V: C49C.2 JP10C.9 P11C.4 | length 575.1
  Top Layer w10: P11C.4@-1576.77,173.23 -1575.79,172.24 -1528.54,172.24 -1507.87,192.91 -1486.22,192.91 ; C49C.2@-1484.25,228.35 -1484.25,194.88 -1486.22,192.91 ; v1(-1184.06,183.07) -1184.06,212.6 -1214.57,243.11 -1320.87,243.11 -1371.06,192.91 -1486.22,192.91
  Bottom Layer w10: JP10C.9@-1196.85,114.17 -1196.85,146.65 -1184.06,159.45 v1(-1184.06,183.07)
pads on no net: JP10C.0 P10C.0 P10C.1 P10C.14 P10C.24 P10C.25 P10C.30 P11C.0 U10C.1 U11P.5

## Polygon pours and split planes (outlines as drawn)
GND on Bottom Layer "gnd" (solid, remove dead copper, pour order 6): -1929.13,-1188.98 -47.24,-1188.98 208.66,-933.07 208.66,291.34 133.86,366.14 -1842.52,366.14 -1913.39,295.28 -1905.51,287.4 -1905.51,-1173.23
GND on Top Layer "gnd" (solid, remove dead copper, pour order 4): -1897.64,-1181.1 31.5,-1181.1 232.28,-980.32 232.28,255.91 110.24,377.95 -1830.71,377.95 -1960.63,248.03 -1960.63,-1141.73 -1921.26,-1181.1
GND on Internal Plane 1 (split plane): 121.64,-649.19 -23.62,-649.19 -27.54,-649.58 -31.31,-650.72 -34.79,-652.58 -37.83,-655.08 -100.82,-718.07 -103.32,-721.12 -105.18,-724.59 -106.32,-728.36 -106.71,-732.28 -106.71,-1066.52 -1802.74,-1066.52 -1802.74,271.24 121.64,271.24
P1.8VA on Internal Plane 2 (split plane): -733.34,-34.14 -733.34,-58.07 -733.04,-59.61 -732.17,-60.91 -694.77,-98.31 -693.47,-99.18 -691.93,-99.49 -676.18,-99.49 -674.64,-99.18 -673.34,-98.31 -660.74,-85.71 -637.49,-85.71 -625.08,-98.12 -625.08,-106.61 -643.59,-125.11 -644.46,-126.42 -644.76,-127.95 -644.76,-180.12 -644.46,-181.65 -643.59,-182.96 -558.94,-267.6 -557.64,-268.47 -556.1,-268.78 -467.21,-268.78 -449.69,-286.3 -448.39,-287.17 -446.85,-287.48 -427.84,-287.48 -327.83,-387.49 -327.83,-447.83 -327.53,-449.37 -326.66,-450.67 -303.23,-474.1 -303.23,-519.99 -315.64,-532.4 -357.59,-532.4 -400.51,-489.48 -400.51,-400.59 -400.82,-399.05 -401.69,-397.75 -465.67,-333.78 -466.97,-332.91 -468.5,-332.6 -484.25,-332.6 -485.79,-332.91 -487.09,-333.78 -510.52,-357.21 -520.98,-357.21 -538.5,-339.68 -539.8,-338.81 -541.34,-338.51 -569.88,-338.51 -571.42,-338.81 -572.72,-339.68 -730.01,-496.97 -790.35,-496.97 -791.89,-497.28 -793.19,-498.15 -825.48,-530.43 -851.68,-530.43 -1037.32,-344.79 -1037.32,-306.78 -934.17,-203.63 -933.3,-202.32 -932.99,-200.79 -932.99,-128.63 -925.5,-121.14 -915.05,-121.14 -890.63,-145.55 -889.33,-146.43 -887.8,-146.73 -857.28,-146.73 -855.75,-146.43 -854.45,-145.55 -804.25,-95.36 -803.38,-94.06 -803.07,-92.52 -803.07,-43 -773.93,-13.86 -753.63,-13.86
P1.8VD on Internal Plane 2 (split plane): -657.37,-50.08 -656.06,-50.95 -654.53,-51.26 -602.06,-51.26 -584.72,-68.59 -584.72,-182.09 -584.42,-183.62 -583.55,-184.92 -568.78,-199.69 -567.48,-200.56 -565.94,-200.86 -414.06,-200.86 -213.66,-401.27 -213.66,-477.36 -213.66,-507.2 -289.06,-582.6 -403.85,-582.6 -445,-541.45 -446.3,-540.58 -447.83,-540.28 -683.07,-540.28 -684.61,-540.58 -685.91,-541.45 -717.21,-572.76 -793.31,-572.76 -794.84,-573.06 -796.15,-573.93 -811.7,-589.49 -880.23,-589.49 -1090.47,-379.24 -1090.47,-256.58 -992.24,-158.35 -991.37,-157.05 -991.06,-155.51 -991.06,-111.9 -954.05,-74.88 -920.95,-74.88 -886.7,-109.14 -885.39,-110.01 -883.86,-110.31 -870.08,-110.31 -868.54,-110.01 -867.24,-109.14 -858.38,-100.28 -857.51,-98.98 -857.21,-97.44 -857.21,-40.05 -786.72,30.43 -737.88,30.43
P3.3V on Internal Plane 2 (split plane): 121.64,-649.19 -23.62,-649.19 -27.54,-649.58 -31.31,-650.72 -34.79,-652.58 -37.83,-655.08 -100.82,-718.07 -103.32,-721.12 -105.18,-724.59 -106.32,-728.36 -106.71,-732.28 -106.71,-1066.52 -1802.74,-1066.52 -1802.74,271.24 121.64,271.24

## Keep-outs
Keep-Out Layer:
  lines w39.37: -1822.83,-1086.61 -1822.83,291.34 141.73,291.34 141.73,-669.29 -23.62,-669.29 -86.61,-732.28 -86.61,-1086.61 -885.83,-1086.61 -1822.83,-1086.61

## Other copper
Top Layer:
  rectangle net P1.8VA: -361.22,-536.42 -304.13,-493.11
  rectangle net P1.8VD: -311.02,-452.76 -229.33,-325.79
  rectangle net GND: -170.28,-437.99 -99.41,-301.18
  text "1" at -55.12,224.41 h27.56
Bottom Layer:
  text "4" at 62.99,224.41 h27.56
Internal Plane 1 (plane layer: these items are gaps in the copper):
  rectangle: 0.65,220.47 90.55,257.86
  rectangle: -62.99,220.47 -29.53,257.86
  text "2" at -23.62,224.41 h27.56
Internal Plane 2 (plane layer: these items are gaps in the copper):
  rectangle: -62.99,220.47 13.78,257.86
  rectangle: 43.96,220.47 90.55,257.86
  lines w7.87: -1094.49,-380.91 -881.89,-593.5 -810.04,-593.5 -793.31,-576.77 -715.55,-576.77 -683.07,-544.29 -447.83,-544.29 -405.51,-586.61 -287.4,-586.61 -209.65,-508.86 -209.65,-477.36 -209.65,-399.61 -412.4,-196.85 -565.94,-196.85 -580.71,-182.09 -580.71,-66.93 -600.39,-47.24 -654.53,-47.24 -736.22,34.45 -788.39,34.45 -861.22,-38.39 -861.22,-97.44 -870.08,-106.3 -883.86,-106.3 -919.29,-70.87 -955.71,-70.87 -995.08,-110.24 -995.08,-155.51 -1094.49,-254.92 -1094.49,-380.91 ; -1041.34,-346.46 -853.35,-534.45 -823.82,-534.45 -790.35,-500.98 -728.35,-500.98 -569.88,-342.52 -541.34,-342.52 -522.64,-361.22 -508.86,-361.22 -484.25,-336.61 -468.5,-336.61 -404.53,-400.59 -404.53,-491.14 -359.25,-536.42 -313.98,-536.42 -299.21,-521.65 -299.21,-472.44 -323.82,-447.83 -323.82,-385.83 -426.18,-283.46 -446.85,-283.46 -465.55,-264.76 -556.1,-264.76 -640.75,-180.12 -640.75,-127.95 -621.06,-108.27 -621.06,-96.46 -635.83,-81.69 -662.4,-81.69 -676.18,-95.47 -691.93,-95.47 -729.33,-58.07 -729.33,-32.48 -751.97,-9.84 -775.59,-9.84 -807.09,-41.34 -807.09,-92.52 -857.28,-142.72 -887.8,-142.72 -913.39,-117.13 -927.17,-117.13 -937.01,-126.97 -937.01,-200.79 -1041.34,-305.12 -1041.34,-346.46
  text "3" at 19.68,224.41 h27.56

## Silkscreen, mask and mechanical layers (free items; w line width, h text height)
Top Overlay:
  circle w7.87: c-1417.32,0 r98.43
  circle w7.87: c0,0 r98.43
  circle w7.87: c-118.11,-590.55 r98.43
  lines w7.87: -466.83,26.36 ccw(c-432.69,26.36) -432.69,-7.79 -146.83,-7.79 ccw(c-146.83,32.21) -106.83,32.21 -106.83,212.21 ccw(c-146.83,212.21) -146.83,252.21 -426.83,252.21 ccw(c-426.83,212.21) -466.83,212.21 -466.83,26.36
  text "Sutajio Ko-Usagi Pte Ltd" at -1339.57,224.41 h30
  text "eDP Adapter DVT1" at -1338.58,169.29 h30
  text "+" at -562.99,82.68 h27.56 r90
  text "-" at -519.69,27.56 h27.56 r180
  text "-" at -1106.3,-35.43 h27.56 r180
  text "2" at -1153.54,-66.93 h27.56
  text "+" at -1145.67,-74.8 h27.56 r180
  text "Designed in Singapore 03/14" at -1787.4,-192.91 h30 r270
  text "-" at -1311.02,-618.11 h27.56 r45
  text "3" at -1295.28,-633.86 h27.56 r45
  text "+" at -1275.59,-657.48 h27.56 r45
  text "-" at -1255.91,-677.17 h27.56 r45
  text "2" at -1232.28,-696.85 h27.56 r45
  text "+" at -1204.72,-724.41 h27.56 r45
Bottom Overlay:
  circle w5: c-1697.84,-349.09 r22.96
  region: -1464.57,267.72 -1799.21,267.72 -1799.21,106.3 -1464.57,106.3
  text "Apache 2.0 License" at -1628.94,-326.77 h30 r90
  text "c bunnie@kosagi.com" at -1687.99,-338.58 h30 r90
Top Solder:
  region: -763.78,-480.32 -716.45,-432.99 -763.78,-385.66 -811.11,-432.99
  region: -711.61,-428.15 -664.29,-380.82 -711.61,-333.5 -758.94,-380.82
  region: -658.46,-375 -611.14,-327.67 -658.46,-280.35 -705.79,-327.67
  region: -606.3,-322.83 -558.97,-275.51 -606.3,-228.18 -653.63,-275.51
  region: -658.46,-270.67 -611.14,-223.34 -658.46,-176.02 -705.79,-223.34
  region: -710.63,-322.83 -663.3,-275.51 -710.63,-228.18 -757.96,-275.51
  region: -763.78,-375.98 -716.45,-328.66 -763.78,-281.33 -811.11,-328.66
  region: -815.94,-428.15 -768.62,-380.82 -815.94,-333.5 -863.27,-380.82
  region: -763.78,-165.35 -716.45,-118.03 -763.78,-70.7 -811.11,-118.03
  region: -815.94,-217.52 -768.62,-170.19 -815.94,-122.87 -863.27,-170.19
  region: -869.09,-270.67 -821.77,-223.34 -869.09,-176.02 -916.42,-223.34
  region: -921.26,-322.83 -873.93,-275.51 -921.26,-228.18 -968.59,-275.51
  region: -710.63,-218.5 -663.3,-171.18 -710.63,-123.85 -757.96,-171.18
  region: -762.8,-270.67 -715.47,-223.34 -762.8,-176.02 -810.12,-223.34
  region: -815.94,-323.82 -768.62,-276.49 -815.94,-229.17 -863.27,-276.49
  region: -868.11,-375.98 -820.78,-328.66 -868.11,-281.33 -915.44,-328.66
Mechanical 3:
  drawing of 151 lines, arcs and shapes, not listed
  text "Board name: eDP Adapter DVT1" at 895.55,1594.24 h39.37
  text "Contact: bunnie@kosagi.com" at 895.55,1494.24 h39.37
  text "Silk: white" at 1908.98,1202.63 h30
  text "Soldermask: green" at 1904.06,1143.58 h30
  text "Material and thickness" at 307.36,1141.88 h50
  text "Finish: Immersion gold" at 1904.06,1090.43 h30
  text "Plate 0.5 oz" at 907.36,941.88 h30
  text "Top-bottom pair" at 1507.36,941.88 h30 r45
  text "Copper 0.5 oz" at 907.36,891.88 h30
  text "4mil = 50 ohm +/- 10%" at 3106.65,843.98 h30
  text "Total 1.0 oz" at 907.36,831.88 h30
  text "4mil width, 5mil space = 100 ohm diff +/- 10%" at 3106.65,725.87 h30
  text "Prepreg" at 507.36,491.88 h30
  text "FR-4 0.1mm" at 907.36,491.88 h30
  text "Copper 1 oz" at 907.36,341.88 h30
  text "Plane" at 3157.36,341.88 h30
  text "0.035mm" at 1027.36,291.88 h30
  text "Core" at 507.36,-108.12 h30
  text "FR-4 height as needed to meet overall height spec" at 907.36,-108.12 h30
  text "Overall height: 1.58mm +/-10%" at 357.36,-308.12 h30 r90
  text "Copper 1 oz" at 907.36,-508.12 h30
  text "0.035mm" at 1027.36,-558.12 h30
  text "Plane" at 3157.36,-558.12 h30
  text "Prepreg" at 507.36,-708.12 h30
  text "FR-4 0.1mm" at 907.36,-708.12 h30
  text "Diff pairs also mirror top side impedance traits" at 3098.95,-932.16 h30
  text "0.125mm = 50 ohm +/- 10%" at 3097.64,-1012.91 h30
  text "Copper 0.5 oz" at 907.36,-1108.12 h30
  text "Finish: Immersion gold" at 1907.01,-1143.83 h30
  text "Plate 0.5 oz" at 907.36,-1158.12 h30
  text "Soldermask: green" at 1902.09,-1206.82 h30
  text "Total 1.0oz" at 913.62,-1219.85 h30
  text "Silk: white" at 1907.01,-1269.81 h30
  text "Mech via: 8 mil hole / 18 mil pad smallest" at 901.46,-1353 h30
  text "Route: 4mil / 4mil smallest" at 901.46,-1453 h30
Drill Drawing:
  text ".LEGEND" at 502.17,-959.45 h60
  text "Drill Drawing." at 502.17,-1059.45 h60

## Text inside footprints (layer, text, board x,y; h text height)
JP10C: Bottom Overlay "1" at -1389.76,90.55 h35 r180